# Altium PCB jeu_du_moulin_boura_PCB.PcbDoc (part 1 of 2)
Units mm, origin at the board's own origin, x right, y up, seen from the top; angles counter-clockwise.
Board outline 86 x 85 mm, 2 copper layers (Top Layer, Bottom Layer); 79 components, 60 nets, 368 pads, 129 vias.
Unrouted connection lines stored in the file: 22.
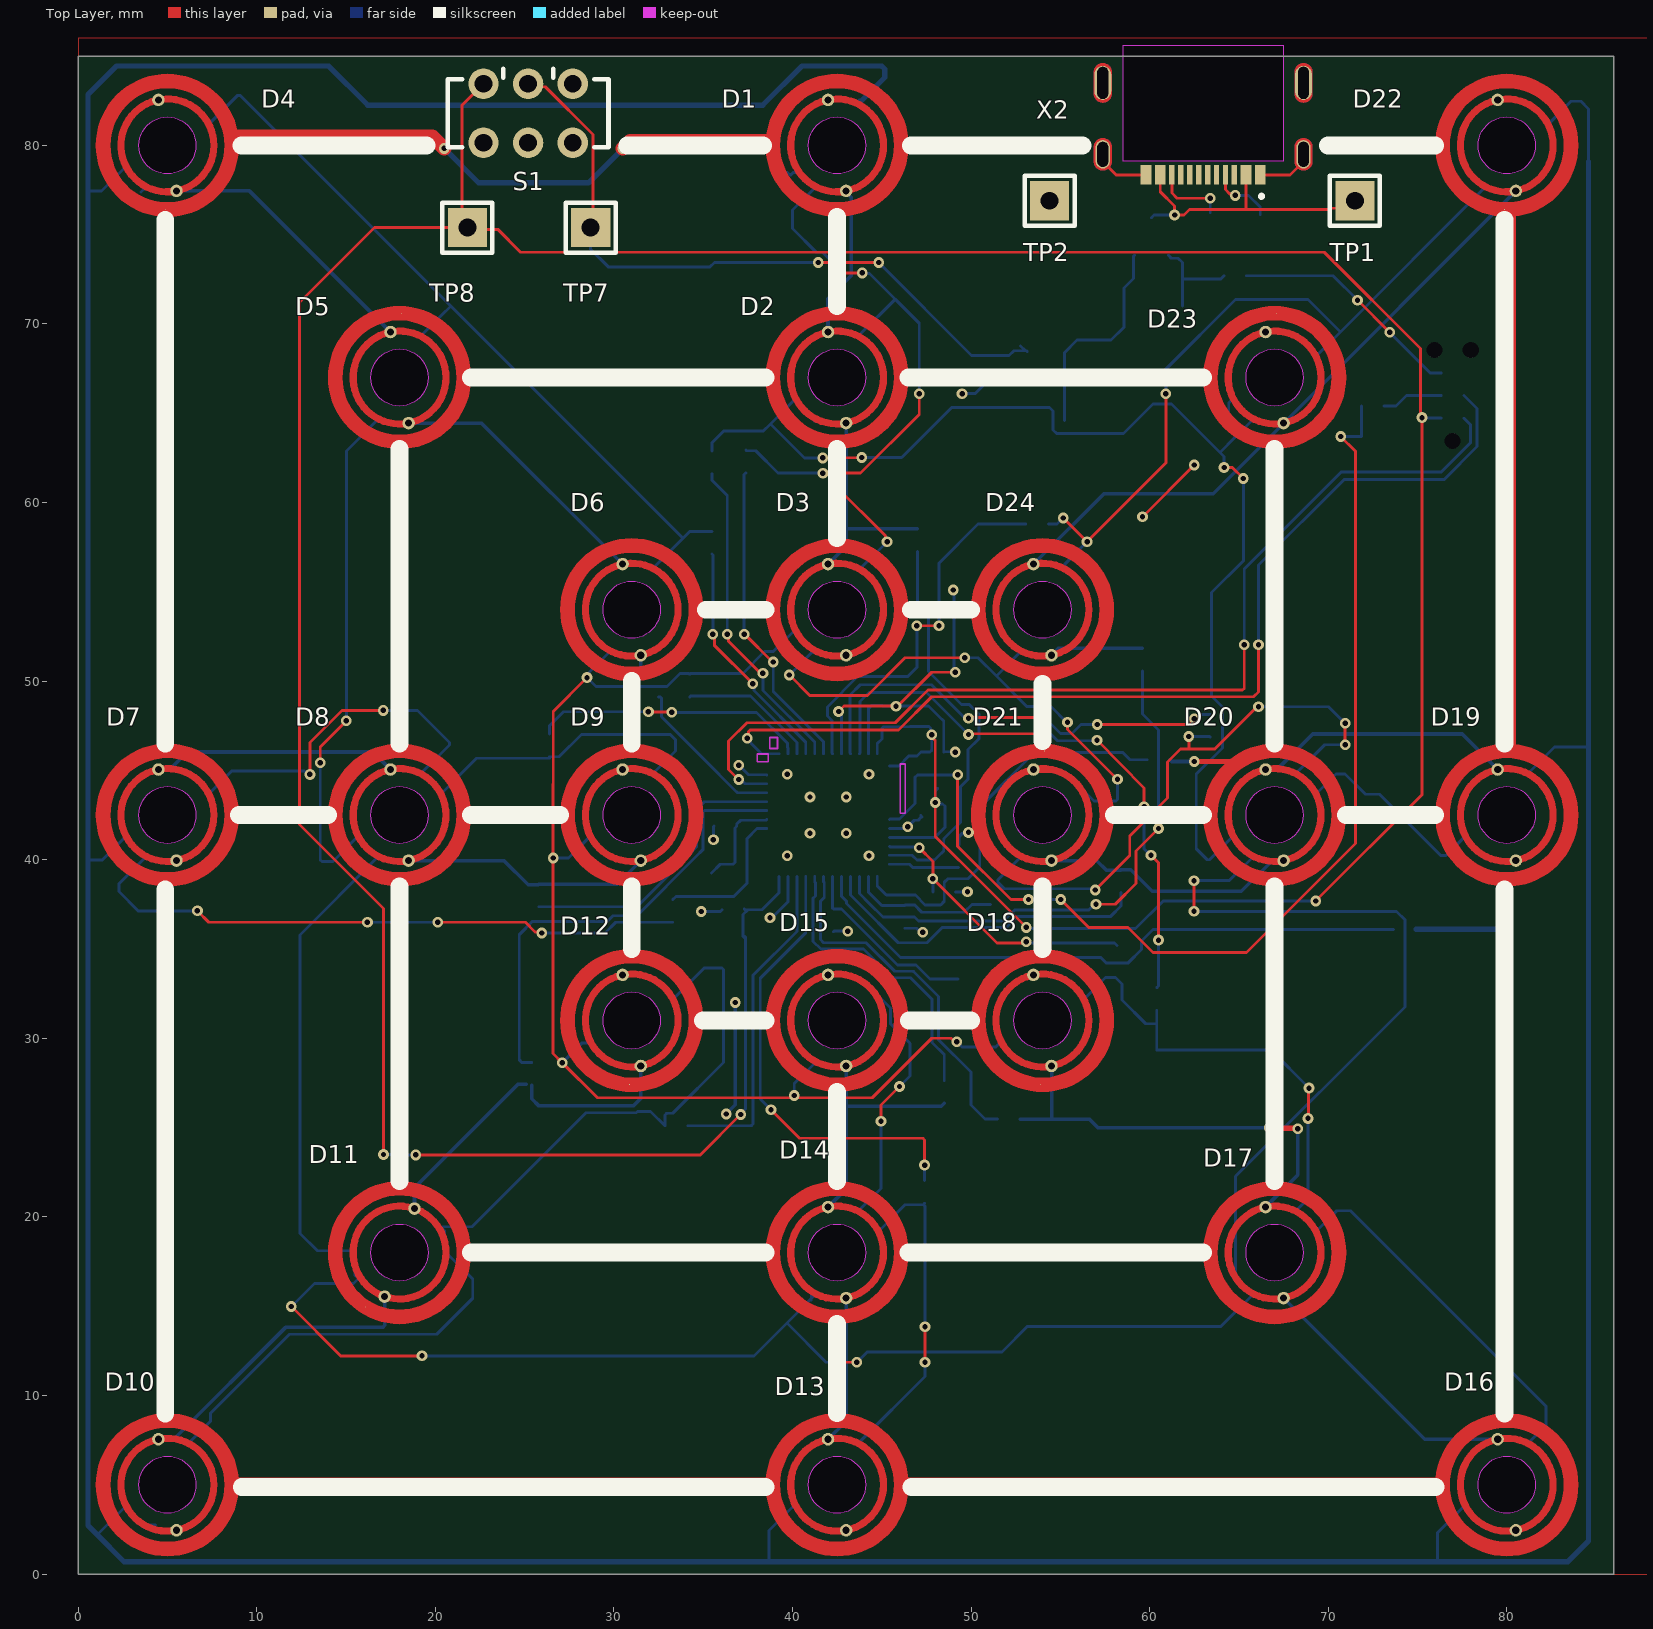
[diagram p0: Top Layer view]
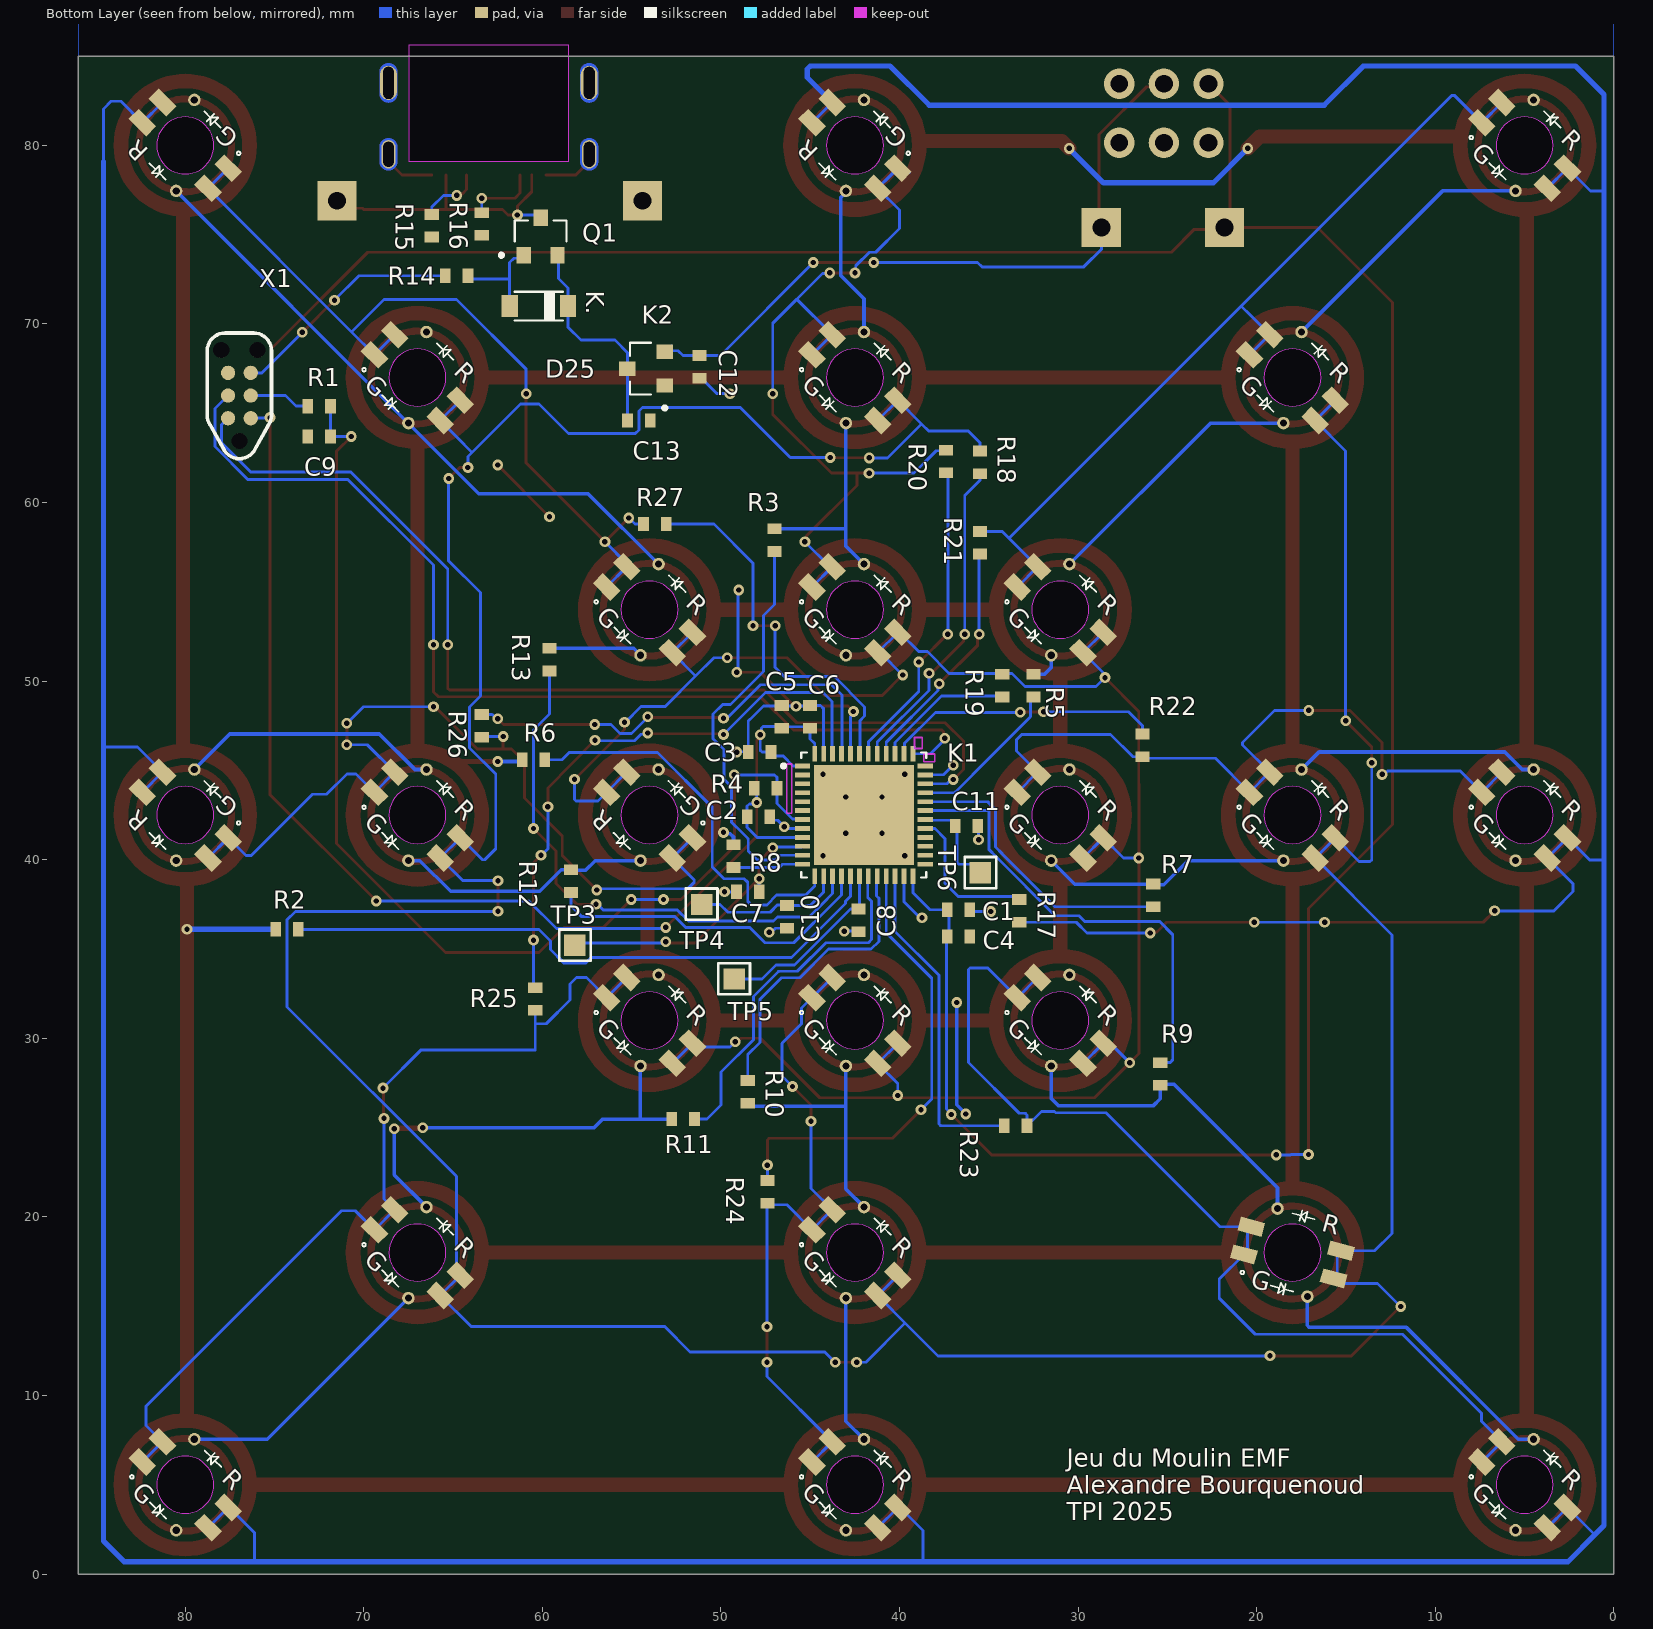
[diagram p1: Bottom Layer view, seen from below]
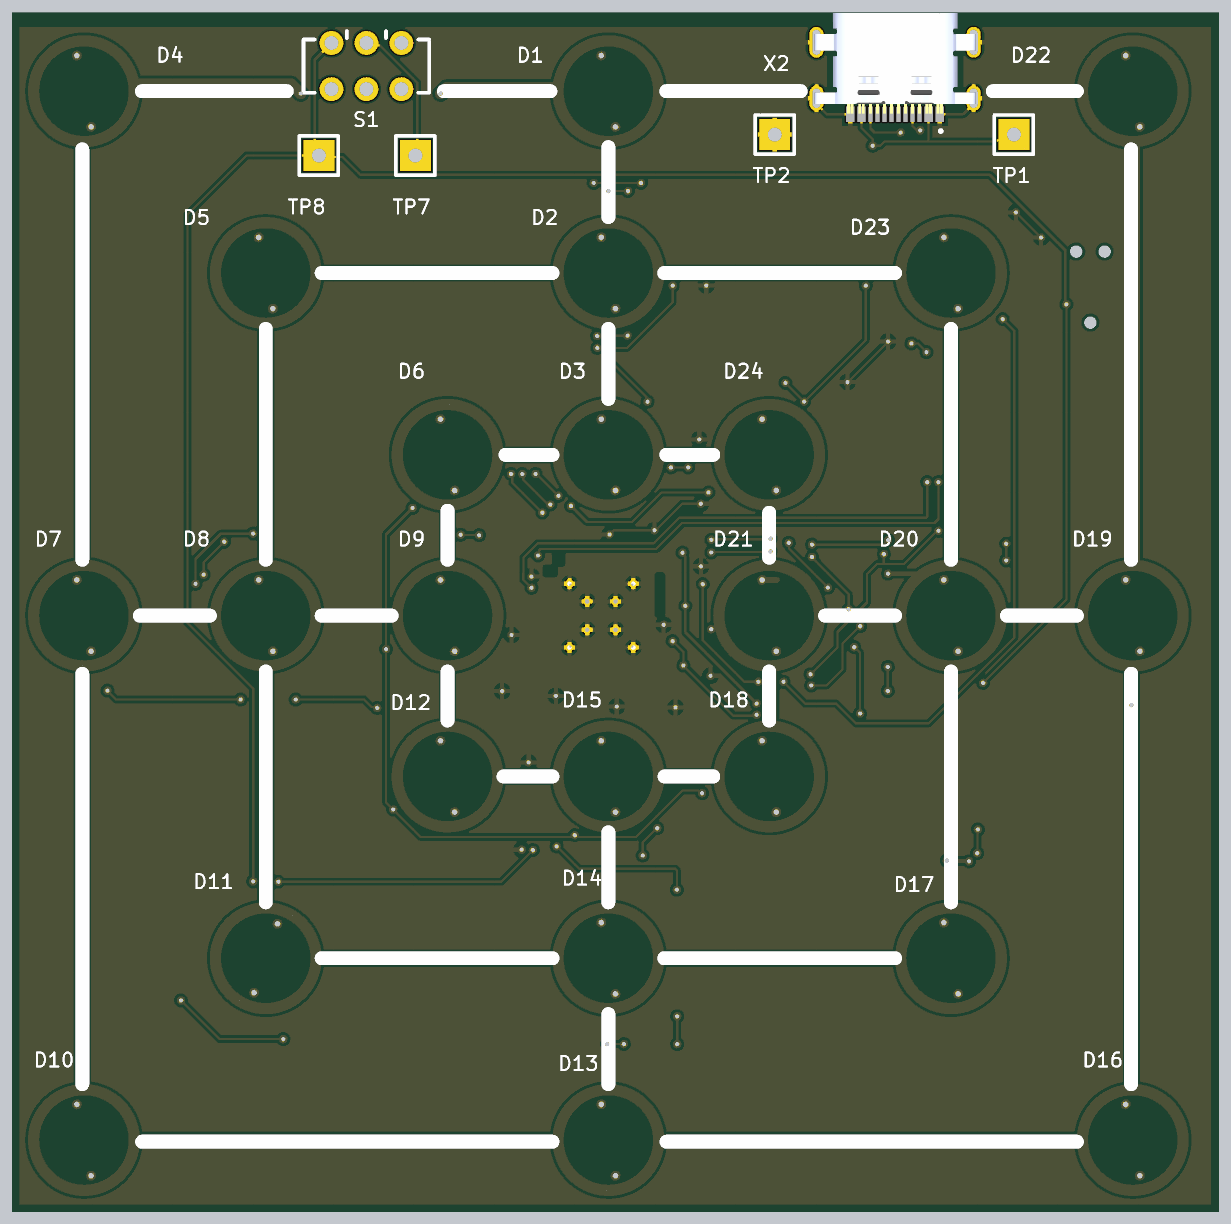
[diagram p3: 3D render of the assembled board from above, using the file's embedded part models]
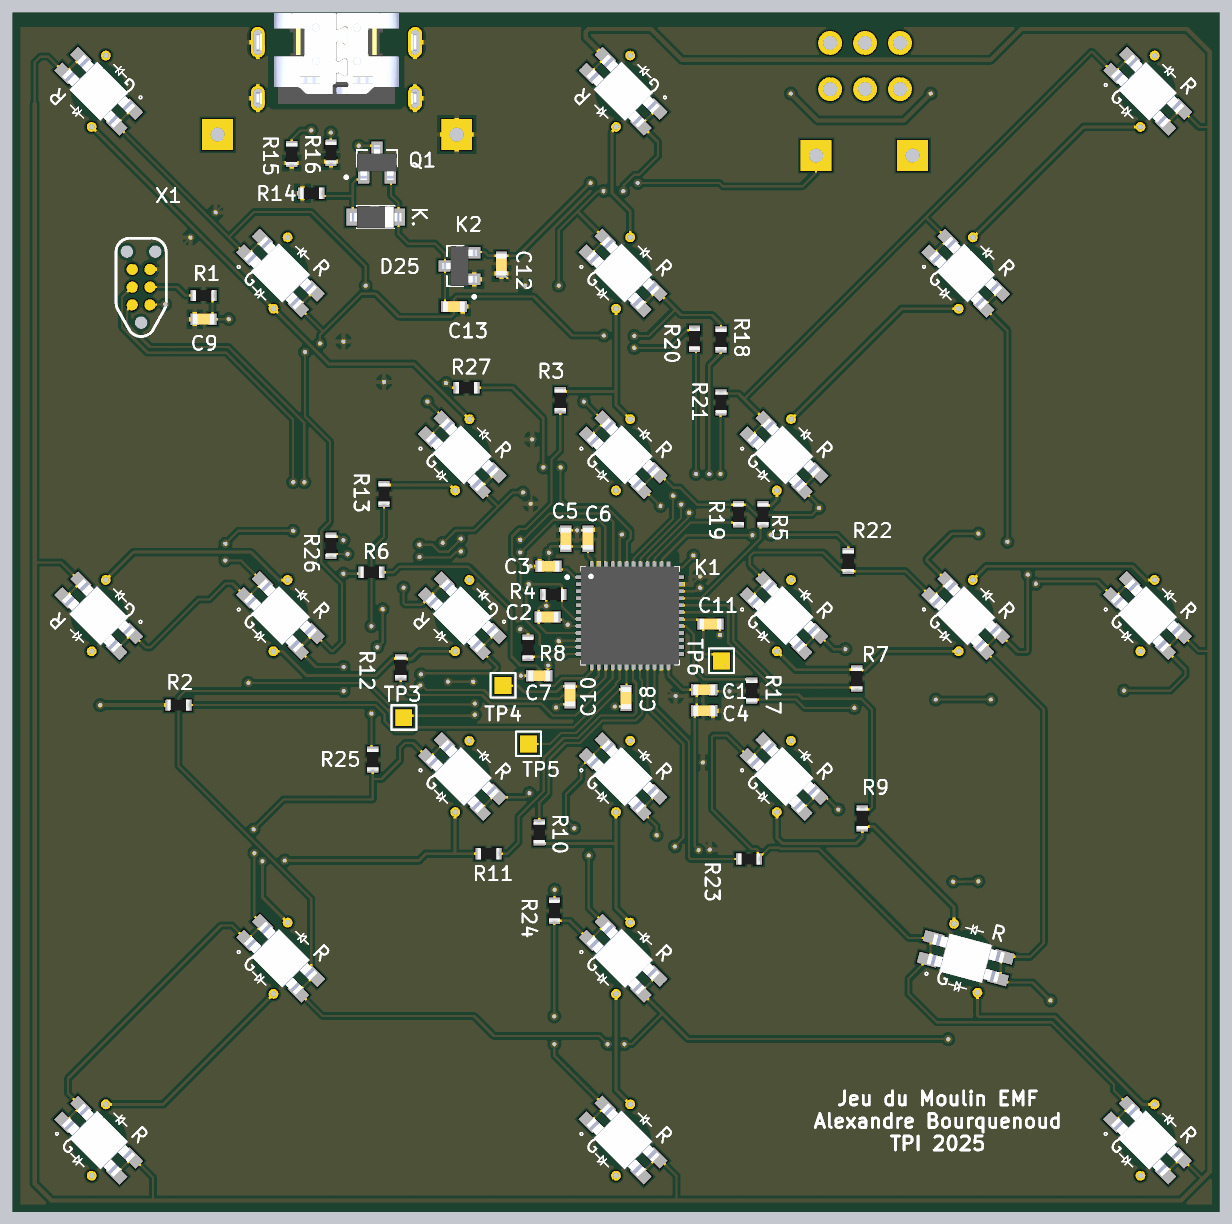
[diagram p4: 3D render of the assembled board from below, using the file's embedded part models]

## Layer stack, top to bottom
Top Solder: solder mask 0.0102, Solder Resist, Dk 3.5
Top Layer: signal copper 0.0356
Dielectric 1: dielectric 0.32, FR-4, Dk 4.8
Bottom Layer: signal copper 0.0356
Bottom Solder: solder mask 0.0102, Solder Resist, Dk 3.5

## Board outline
0,85 86,85 86,0 0,0

## Design rules (kind name [scope] priority, off if disabled: settings)
BoardOutlineClearance USBException [InComponent('X2')] p1: gap=0.19 ignorepadtopadclearanceinfootprint=FALSE
BoardOutlineClearance [All] p2: gap=0.4 ignorepadtopadclearanceinfootprint=FALSE
Clearance ClearanceMCUException [InComponent('K1')] p1: gap=0.1 ignorepadtopadclearanceinfootprint=FALSE
Clearance [All] p2: gap=0.2 ignorepadtopadclearanceinfootprint=FALSE
ComponentClearance [All] p1: gap=0.254 collisioncheckmode=3 verticalgap=0.254 showdistances=TRUE checkcomponentboundary=TRUE
HoleSize [All] p1: absolutevalues=TRUE maxlimit=5 minlimit=0.025 maxpercent=80.000 minpercent=20.000
MinimumSolderMaskSliver MinimumSolderMaskSliver_K1 [InComponent('K1')] p1: minsoldermaskwidth=0.015
MinimumSolderMaskSliver [All] p2: minsoldermaskwidth=0.254
NetAntennae TouchSens [OnLayer('Top Layer')] p1: netantennaetolerance=2000
NetAntennae [All] p2: netantennaetolerance=0
PasteMaskExpansion [HasFootprint('UFQFPN48')] p1: expansion=0 percent=-15.000000
PolygonConnect [All] p1: connectstyle=Relief reliefconductorwidth=0.3 reliefentries=4 polygonreliefangle="90 Angle" airgapwidth=0.3
RoutingVias [All] p1: holewidth=0.711 width=1.27 viastyle="Through Hole" minholewidth=0.711 minwidth=1.27 maxholewidth=0.711 maxwidth=1.27 useviatemplates=TRUE viatemplateguid#1={2E4D9DC0-E99D-456E-B73B-DE4053AAE91D} viatemplateguid#2={0BD63AC6-C6CC-444A-9AA9-DD401E3B135C} viatemplateguid#3={C98394D0-1A6B-4DEB-B82C-5A8B8B4D21F2} viatemplatename#1=v60h30m0mx0 viatemplatename#2=v65h35m0mx0 viatemplatename#3=v100h50m0mx0
SilkToSilkClearance [All] p1: silktosilkclearance=0.156
SilkToSolderMaskClearance SilkToSolderUSBException [HasFootprint('GCT_USB4520-03-0-A_REVA')] p1: minsilkscreentomaskgap=0.1 clearancetoexposedcopper=TRUE
SilkToSolderMaskClearance SilkToSolderuCException [HasFootprint('UFQFPN48')] p2: minsilkscreentomaskgap=0.1 clearancetoexposedcopper=TRUE
SilkToSolderMaskClearance [IsPad] p3: minsilkscreentomaskgap=0.126 clearancetoexposedcopper=TRUE
SolderMaskExpansion [All] p1: expansion=0.102 istentingtop=FALSE
Width "Schematic Width Constraint_3" [InNet('L5_TOUCH')] p1: maxlimit=0.8 minlimit=0.2 preferedwidth=0.8 toplayer_minwidth=0.3 bottomlayer_maxwidth=0.3 bottomlayer_prefwidth=0.25 minimp=50.000000 maximp=50.000000 favimp=50.000000
Width "Schematic Width Constraint_2" [InNet('L7_TOUCH')] p2: maxlimit=0.8 minlimit=0.2 preferedwidth=0.8 toplayer_minwidth=0.3 bottomlayer_maxwidth=0.3 bottomlayer_prefwidth=0.25 minimp=50.000000 maximp=50.000000 favimp=50.000000
Width "Schematic Width Constraint_1" [InNet('L6_TOUCH')] p3: maxlimit=0.8 minlimit=0.2 preferedwidth=0.8 toplayer_minwidth=0.3 bottomlayer_maxwidth=0.3 bottomlayer_prefwidth=0.25 minimp=50.000000 maximp=50.000000 favimp=50.000000
Width "Schematic Width Constraint" [InNet('L8_TOUCH')] p4: maxlimit=0.8 minlimit=0.2 preferedwidth=0.8 toplayer_minwidth=0.3 bottomlayer_maxwidth=0.3 bottomlayer_prefwidth=0.25 minimp=50.000000 maximp=50.000000 favimp=50.000000
Width "Schematic Width Constraint_12" [InNet('L1_TOUCH')] p5: maxlimit=0.8 minlimit=0.2 preferedwidth=0.8 toplayer_minwidth=0.3 bottomlayer_maxwidth=0.3 bottomlayer_prefwidth=0.25 minimp=50.000000 maximp=50.000000 favimp=50.000000
Width "Schematic Width Constraint_11" [InNet('L4_TOUCH')] p6: maxlimit=0.8 minlimit=0.2 preferedwidth=0.8 toplayer_minwidth=0.3 bottomlayer_maxwidth=0.3 bottomlayer_prefwidth=0.25 minimp=50.000000 maximp=50.000000 favimp=50.000000
Width "Schematic Width Constraint_10" [InNet('L3_TOUCH')] p7: maxlimit=0.8 minlimit=0.2 preferedwidth=0.8 toplayer_minwidth=0.3 bottomlayer_maxwidth=0.3 bottomlayer_prefwidth=0.25 minimp=50.000000 maximp=50.000000 favimp=50.000000
Width "Schematic Width Constraint_9" [InNet('C2_TOUCH')] p8: maxlimit=0.8 minlimit=0.2 preferedwidth=0.8 toplayer_minwidth=0.3 bottomlayer_maxwidth=0.3 bottomlayer_prefwidth=0.25 minimp=50.000000 maximp=50.000000 favimp=50.000000
Width "Schematic Width Constraint_8" [InNet('C1_TOUCH')] p9: maxlimit=0.8 minlimit=0.2 preferedwidth=0.8 toplayer_minwidth=0.3 bottomlayer_maxwidth=0.3 bottomlayer_prefwidth=0.25 minimp=50.000000 maximp=50.000000 favimp=50.000000
Width "Schematic Width Constraint_7" [InNet('C3_TOUCH')] p10: maxlimit=0.8 minlimit=0.2 preferedwidth=0.8 toplayer_minwidth=0.3 bottomlayer_maxwidth=0.3 bottomlayer_prefwidth=0.25 minimp=50.000000 maximp=50.000000 favimp=50.000000
Width Width_PAD [InComponent('D1')  Or InComponent('D2')  Or InComponent('D3')  Or InComponent('D4')  Or InComponent('D5')  Or InComponent('D6')  Or InComponent('D7')  Or InComponent('D8')  Or InComponent('D9')  Or InComponent('D10') Or InComponent('D11') Or InComponent('D12') Or InComponent('D13') Or InComponent('D14')] p11: maxlimit=1 minlimit=0.25 preferedwidth=0.254
Width "Schematic Width Constraint_6" [InNet('L2_TOUCH')] p12: maxlimit=0.8 minlimit=0.2 preferedwidth=0.8 toplayer_minwidth=0.3 bottomlayer_maxwidth=0.3 bottomlayer_prefwidth=0.25 minimp=50.000000 maximp=50.000000 favimp=50.000000
Width [All] p13: maxlimit=0.3 minlimit=0.16 preferedwidth=0.25
23 further rules are at their usual default settings.

## Classes and differential pairs
component class jeu_du_moulin_boura_LedMatrix_SCH: R17 R18 R19 R20 R21 R22 R23 R24 R25 R26 R27
component class jeu_du_moulin_boura_TouchPAD_SCH: D1 D2 D3 D4 D5 D6 D7 D8 D9 D10 D11 D12 D13 D14 D15 D16 D17 D18 D19 D20 D21 D22 D23 D24
component class jeu_du_moulin_boura_uP_SCH: C1 C2 C3 C4 C5 C6 C7 C8 C9 C10 C11 C12 C13 D25 K1 K2 Q1 R1 R2 R3 R4 R5 R6 R7 R8 R9 R10 R11 R12 R13 R14 R15 R16 S1 TP1 TP2 TP3 TP4 TP5 TP6 TP7 TP8 X1 X2

## Components (designator, comment, footprint, x,y, rotation, side; value= is the part's Value field where it differs from the comment)
C1 "10uF" CSMD0603 36.7,37.2 r180 bottom
C2 "100nF" CSMD0603 47.9,42.4 r180 bottom
C3 "100nF" CSMD0603 47.835,46.033 r0 bottom
C4 "1uF" CSMD0603 36.7,35.7 r180 bottom
C5 "100nF" CSMD0603 46.6,48 r90 bottom
C6 "100nF" CSMD0603 45.019,48 r90 bottom
C7 "47nF" CSMD0603 48.5,38.2 r0 bottom
C8 "47nF" CSMD0603 42.3,36.6 r270 bottom
C9 "100nF" CSMD0603 72.5,63.7 r0 bottom
C10 "47nF" CSMD0603 46.3,36.8 r270 bottom
C11 "47nF" CSMD0603 36.25,41.891 r180 bottom
C12 "1uF" CSMD0603 51.2,67.6 r90 bottom
C13 "1uF" CSMD0603 54.6,64.6 r0 bottom
D1 "AAA3528SURKCGKC09" "TOUCHPAD-8MM+LED 4-SMD CIR" 42.5,80 r180 top
D2 "AAA3528SURKCGKC09" "TOUCHPAD-8MM+LED 4-SMD CIR" 42.5,67 r0 top
D3 "AAA3528SURKCGKC09" "TOUCHPAD-8MM+LED 4-SMD CIR" 42.5,54 r0 top
D4 "AAA3528SURKCGKC09" "TOUCHPAD-8MM+LED 4-SMD CIR" 5,80 r0 top
D5 "AAA3528SURKCGKC09" "TOUCHPAD-8MM+LED 4-SMD CIR" 18,67 r0 top
D6 "AAA3528SURKCGKC09" "TOUCHPAD-8MM+LED 4-SMD CIR" 31,54 r0 top
D7 "AAA3528SURKCGKC09" "TOUCHPAD-8MM+LED 4-SMD CIR" 5,42.5 r0 top
D8 "AAA3528SURKCGKC09" "TOUCHPAD-8MM+LED 4-SMD CIR" 18,42.5 r0 top
D9 "AAA3528SURKCGKC09" "TOUCHPAD-8MM+LED 4-SMD CIR" 31,42.5 r0 top
D10 "AAA3528SURKCGKC09" "TOUCHPAD-8MM+LED 4-SMD CIR" 5,5 r0 top
D11 "AAA3528SURKCGKC09" "TOUCHPAD-8MM+LED 4-SMD CIR" 18,18 r330 top
D12 "AAA3528SURKCGKC09" "TOUCHPAD-8MM+LED 4-SMD CIR" 31,31 r0 top
D13 "AAA3528SURKCGKC09" "TOUCHPAD-8MM+LED 4-SMD CIR" 42.5,5 r0 top
D14 "AAA3528SURKCGKC09" "TOUCHPAD-8MM+LED 4-SMD CIR" 42.5,18 r0 top
D15 "AAA3528SURKCGKC09" "TOUCHPAD-8MM+LED 4-SMD CIR" 42.5,31 r0 top
D16 "AAA3528SURKCGKC09" "TOUCHPAD-8MM+LED 4-SMD CIR" 80,5 r0 top
D17 "AAA3528SURKCGKC09" "TOUCHPAD-8MM+LED 4-SMD CIR" 67,18 r0 top
D18 "AAA3528SURKCGKC09" "TOUCHPAD-8MM+LED 4-SMD CIR" 54,31 r0 top
D19 "AAA3528SURKCGKC09" "TOUCHPAD-8MM+LED 4-SMD CIR" 80,42.5 r180 top
D20 "AAA3528SURKCGKC09" "TOUCHPAD-8MM+LED 4-SMD CIR" 67,42.5 r0 top
D21 "AAA3528SURKCGKC09" "TOUCHPAD-8MM+LED 4-SMD CIR" 54,42.5 r180 top
D22 "AAA3528SURKCGKC09" "TOUCHPAD-8MM+LED 4-SMD CIR" 80,80 r180 top
D23 "AAA3528SURKCGKC09" "TOUCHPAD-8MM+LED 4-SMD CIR" 67,67 r0 top
D24 "AAA3528SURKCGKC09" "TOUCHPAD-8MM+LED 4-SMD CIR" 54,54 r0 top
D25 "Zener 2.4V" SOD-123 60.2,71 r0 bottom
K1 "STM32L072CZU6" UFQFPN48 42,42.5 r180 bottom
K2 "Voltage Regulator 3.3V" SOT95P240X88-3N 54.2,67.5 r90 bottom
Q1 "MOSFET Channel P" SOT95P240X88-3N 60.1,74.9 r180 bottom
R1 "NMT" RSMD0603 72.5,65.4 r0 bottom
R2 "10K" RSMD0603 74.3,36.1 r0 bottom
R3 "10K" RSMD0603 47,57.9 r90 bottom
R4 "39K" RSMD0603 47.5,44 r180 bottom
R5 "10K" RSMD0603 32.5,49.75 r90 bottom
R6 "10K" RSMD0603 60.5,45.6 r0 bottom
R7 "10K" RSMD0603 25.8,38 r90 bottom
R8 "10K" RSMD0603 49.3,40.2 r90 bottom
R9 "10K" RSMD0603 25.4,28 r270 bottom
R10 "10K" RSMD0603 48.5,27 r270 bottom
R11 "10K" RSMD0603 52.121,25.476 r0 bottom
R12 "10K" RSMD0603 58.4,38.8 r90 bottom
R13 "10K" RSMD0603 59.6,51.2 r90 bottom
R14 "220E" RSMD0603 64.8,72.7 r0 bottom
R15 "5.1k" RSMD0603 66.2,75.5 r90 bottom
R16 "5.1k" RSMD0603 63.4,75.6 r90 bottom
R17 "150E" RSMD0603 33.299,37.135 r270 bottom
R18 "150E" RSMD0603 35.5,62.25 r90 bottom
R19 "150E" RSMD0603 34.25,49.75 r90 bottom
R20 "150E" RSMD0603 37.4,62.3 r270 bottom
R21 "150E" RSMD0603 35.5,57.75 r270 bottom
R22 "150E" RSMD0603 26.4,46.4 r90 bottom
R23 "150E" RSMD0603 33.5,25.1 r0 bottom
R24 "150E" RSMD0603 47.4,21.4 r90 bottom
R25 "150E" RSMD0603 60.4,32.2 r90 bottom
R26 "150E" RSMD0603 63.4,47.5 r90 bottom
R27 "150E" RSMD0603 53.7,58.8 r180 bottom
S1 "SW_SPDT" "SWITCH SLIDE DPDT" 25.2,81.8 r180 top
TP1 "TP rouge" TP10_22 71.5,76.9 r0 top
TP2 "TP noir" TP10_22 54.4,76.9 r0 top
TP3 "Test Point" TP 58.191,35.204 r180 bottom
TP4 "Test Point" TP 51.1,37.5 r180 bottom
TP5 "Test Point" TP 49.276,33.325 r180 bottom
TP6 "Test Point" TP 35.484,39.268 r180 bottom
TP7 "TP rouge" TP10_22 28.7,75.4 r0 top
TP8 "TP noir" TP10_22 21.8,75.4 r0 top
X1 "CONNECTOR TC2030-NL" "T-CONNECT 2030" 76.97,65.993 r90 bottom
X2 "USB4520-03-0-A_REVA" GCT_USB4520-03-0-A_REVA 63,83.5 r180 top

## Footprints (in the part's own frame and the unit in brackets; to place one, negate y for a bottom-side part, rotate by r counter-clockwise, add the part's x,y. Pads: shape width x height; smd on the part's side, far side on the other; paste and mask are expansions set on the pad)
CSMD0603 [mm] "P1 - 0603"
  rect 0.6x0.8 smd: 1(-0.635,0) 2(0.635,0)
  body extent -0.8,-0.4 0.8,0.4, height 0.85
GCT_USB4520-03-0-A_REVA [mm] "USB-C"
  rect 0.6x1.1 smd: A1_B12(-3.2,5.15) A4_B9(-2.4,5.15) B1_A12(3.2,5.15) B4_A9(2.4,5.15)
  rect 0.3x1.1 smd: A5(-1.25,5.15) A6(-0.25,5.15) A7(0.25,5.15) A8(1.25,5.15) B5(1.75,5.15) B6(0.75,5.15) B7(-0.75,5.15) B8(-1.75,5.15)
  oval 0.95x1.9 hole 0.6 slot 1.8 at 90 deg mask+0: S1(-5.62,0) S4(5.62,0)
  oval 0.8x1.6 hole 0.6 slot 1.4 at 90 deg mask+0: S2(5.62,4) S3(-5.62,4)
  Top Layer region: -5.594,4.899 -5.568,4.897 -5.542,4.894 -5.516,4.889 -5.491,4.883 -5.465,4.876 -5.441,4.867 -5.417,4.857 -5.393,4.846 -5.37,4.833 -5.348,4.819 -5.326,4.805 -5.305,4.789 -5.285,4.772 -5.266,4.754 -5.248,4.735 -5.231,4.715 -5.215,4.694 -5.201,4.672 -5.187,4.65 -5.174,4.627 -5.163,4.603 -5.153,4.579 -5.144,4.555 -5.137,4.529 -5.131,4.504 -5.126,4.478 -5.123,4.452 -5.121,4.426 -5.12,4.4 -5.12,3.6 -5.121,3.574 -5.123,3.548 -5.126,3.522 -5.131,3.496 -5.137,3.471 -5.144,3.445 -5.153,3.421 -5.163,3.397 -5.174,3.373 -5.187,3.35 -5.201,3.328 -5.215,3.306 -5.231,3.285 -5.248,3.265 -5.266,3.246 -5.285,3.228 -5.305,3.211 -5.326,3.195 -5.348,3.181 -5.37,3.167 -5.393,3.154 -5.417,3.143 -5.441,3.133 -5.465,3.124 -5.491,3.117 -5.516,3.111 -5.542,3.106 -5.568,3.103 -5.594,3.101 -5.62,3.1 -5.646,3.101 -5.672,3.103 -5.698,3.106 -5.724,3.111 -5.749,3.117 -5.775,3.124 -5.799,3.133 -5.823,3.143 -5.847,3.154 -5.87,3.167 -5.892,3.181 -5.914,3.195 -5.935,3.211 -5.955,3.228 -5.974,3.246 -5.992,3.265 -6.009,3.285 -6.025,3.306 -6.039,3.328 -6.053,3.35 -6.066,3.373 -6.077,3.397 -6.087,3.421 -6.096,3.445 -6.103,3.471 -6.109,3.496 -6.114,3.522 -6.117,3.548 -6.119,3.574 -6.12,3.6 -6.12,4.4 -6.119,4.426 -6.117,4.452 -6.114,4.478 -6.109,4.504 -6.103,4.529 -6.096,4.555 -6.087,4.579 -6.077,4.603 -6.066,4.627 -6.053,4.65 -6.039,4.672 -6.025,4.694 -6.009,4.715 -5.992,4.735 -5.974,4.754 -5.955,4.772 -5.935,4.789 -5.914,4.805 -5.892,4.819 -5.87,4.833 -5.847,4.846 -5.823,4.857 -5.799,4.867 -5.775,4.876 -5.749,4.883 -5.724,4.889 -5.698,4.894 -5.672,4.897 -5.646,4.899 -5.62,4.9
  Top Layer region: 5.646,4.899 5.672,4.897 5.698,4.894 5.724,4.889 5.749,4.883 5.775,4.876 5.799,4.867 5.823,4.857 5.847,4.846 5.87,4.833 5.892,4.819 5.914,4.805 5.935,4.789 5.955,4.772 5.974,4.754 5.992,4.735 6.009,4.715 6.025,4.694 6.039,4.672 6.053,4.65 6.066,4.627 6.077,4.603 6.087,4.579 6.096,4.555 6.103,4.529 6.109,4.504 6.114,4.478 6.117,4.452 6.119,4.426 6.12,4.4 6.12,3.6 6.119,3.574 6.117,3.548 6.114,3.522 6.109,3.496 6.103,3.471 6.096,3.445 6.087,3.421 6.077,3.397 6.066,3.373 6.053,3.35 6.039,3.328 6.025,3.306 6.009,3.285 5.992,3.265 5.974,3.246 5.955,3.228 5.935,3.211 5.914,3.195 5.892,3.181 5.87,3.167 5.847,3.154 5.823,3.143 5.799,3.133 5.775,3.124 5.749,3.117 5.724,3.111 5.698,3.106 5.672,3.103 5.646,3.101 5.62,3.1 5.594,3.101 5.568,3.103 5.542,3.106 5.516,3.111 5.491,3.117 5.465,3.124 5.441,3.133 5.417,3.143 5.393,3.154 5.37,3.167 5.348,3.181 5.326,3.195 5.305,3.211 5.285,3.228 5.266,3.246 5.248,3.265 5.231,3.285 5.215,3.306 5.201,3.328 5.187,3.35 5.174,3.373 5.163,3.397 5.153,3.421 5.144,3.445 5.137,3.471 5.131,3.496 5.126,3.522 5.123,3.548 5.121,3.574 5.12,3.6 5.12,4.4 5.121,4.426 5.123,4.452 5.126,4.478 5.131,4.504 5.137,4.529 5.144,4.555 5.153,4.579 5.163,4.603 5.174,4.627 5.187,4.65 5.201,4.672 5.215,4.694 5.231,4.715 5.248,4.735 5.266,4.754 5.285,4.772 5.305,4.789 5.326,4.805 5.348,4.819 5.37,4.833 5.393,4.846 5.417,4.857 5.441,4.867 5.465,4.876 5.491,4.883 5.516,4.889 5.542,4.894 5.568,4.897 5.594,4.899 5.62,4.9
  Top Layer region: -5.594,1.099 -5.568,1.097 -5.542,1.094 -5.516,1.089 -5.491,1.083 -5.465,1.076 -5.441,1.067 -5.417,1.057 -5.393,1.046 -5.37,1.033 -5.348,1.019 -5.326,1.005 -5.305,0.989 -5.285,0.972 -5.266,0.954 -5.248,0.935 -5.231,0.915 -5.215,0.894 -5.201,0.872 -5.187,0.85 -5.174,0.827 -5.163,0.803 -5.153,0.779 -5.144,0.755 -5.137,0.729 -5.131,0.704 -5.126,0.678 -5.123,0.652 -5.121,0.626 -5.12,0.6 -5.12,-0.6 -5.121,-0.626 -5.123,-0.652 -5.126,-0.678 -5.131,-0.704 -5.137,-0.729 -5.144,-0.755 -5.153,-0.779 -5.163,-0.803 -5.174,-0.827 -5.187,-0.85 -5.201,-0.872 -5.215,-0.894 -5.231,-0.915 -5.248,-0.935 -5.266,-0.954 -5.285,-0.972 -5.305,-0.989 -5.326,-1.005 -5.348,-1.019 -5.37,-1.033 -5.393,-1.046 -5.417,-1.057 -5.441,-1.067 -5.465,-1.076 -5.491,-1.083 -5.516,-1.089 -5.542,-1.094 -5.568,-1.097 -5.594,-1.099 -5.62,-1.1 -5.646,-1.099 -5.672,-1.097 -5.698,-1.094 -5.724,-1.089 -5.749,-1.083 -5.775,-1.076 -5.799,-1.067 -5.823,-1.057 -5.847,-1.046 -5.87,-1.033 -5.892,-1.019 -5.914,-1.005 -5.935,-0.989 -5.955,-0.972 -5.974,-0.954 -5.992,-0.935 -6.009,-0.915 -6.025,-0.894 -6.039,-0.872 -6.053,-0.85 -6.066,-0.827 -6.077,-0.803 -6.087,-0.779 -6.096,-0.755 -6.103,-0.729 -6.109,-0.704 -6.114,-0.678 -6.117,-0.652 -6.119,-0.626 -6.12,-0.6 -6.12,0.6 -6.119,0.626 -6.117,0.652 -6.114,0.678 -6.109,0.704 -6.103,0.729 -6.096,0.755 -6.087,0.779 -6.077,0.803 -6.066,0.827 -6.053,0.85 -6.039,0.872 -6.025,0.894 -6.009,0.915 -5.992,0.935 -5.974,0.954 -5.955,0.972 -5.935,0.989 -5.914,1.005 -5.892,1.019 -5.87,1.033 -5.847,1.046 -5.823,1.057 -5.799,1.067 -5.775,1.076 -5.749,1.083 -5.724,1.089 -5.698,1.094 -5.672,1.097 -5.646,1.099 -5.62,1.1
  Top Layer region: 5.646,1.099 5.672,1.097 5.698,1.094 5.724,1.089 5.749,1.083 5.775,1.076 5.799,1.067 5.823,1.057 5.847,1.046 5.87,1.033 5.892,1.019 5.914,1.005 5.935,0.989 5.955,0.972 5.974,0.954 5.992,0.935 6.009,0.915 6.025,0.894 6.039,0.872 6.053,0.85 6.066,0.827 6.077,0.803 6.087,0.779 6.096,0.755 6.103,0.729 6.109,0.704 6.114,0.678 6.117,0.652 6.119,0.626 6.12,0.6 6.12,-0.6 6.119,-0.626 6.117,-0.652 6.114,-0.678 6.109,-0.704 6.103,-0.729 6.096,-0.755 6.087,-0.779 6.077,-0.803 6.066,-0.827 6.053,-0.85 6.039,-0.872 6.025,-0.894 6.009,-0.915 5.992,-0.935 5.974,-0.954 5.955,-0.972 5.935,-0.989 5.914,-1.005 5.892,-1.019 5.87,-1.033 5.847,-1.046 5.823,-1.057 5.799,-1.067 5.775,-1.076 5.749,-1.083 5.724,-1.089 5.698,-1.094 5.672,-1.097 5.646,-1.099 5.62,-1.1 5.594,-1.099 5.568,-1.097 5.542,-1.094 5.516,-1.089 5.491,-1.083 5.465,-1.076 5.441,-1.067 5.417,-1.057 5.393,-1.046 5.37,-1.033 5.348,-1.019 5.326,-1.005 5.305,-0.989 5.285,-0.972 5.266,-0.954 5.248,-0.935 5.231,-0.915 5.215,-0.894 5.201,-0.872 5.187,-0.85 5.174,-0.827 5.163,-0.803 5.153,-0.779 5.144,-0.755 5.137,-0.729 5.131,-0.704 5.126,-0.678 5.123,-0.652 5.121,-0.626 5.12,-0.6 5.12,0.6 5.121,0.626 5.123,0.652 5.126,0.678 5.131,0.704 5.137,0.729 5.144,0.755 5.153,0.779 5.163,0.803 5.174,0.827 5.187,0.85 5.201,0.872 5.215,0.894 5.231,0.915 5.248,0.935 5.266,0.954 5.285,0.972 5.305,0.989 5.326,1.005 5.348,1.019 5.37,1.033 5.393,1.046 5.417,1.057 5.441,1.067 5.465,1.076 5.491,1.083 5.516,1.089 5.542,1.094 5.568,1.097 5.594,1.099 5.62,1.1
  Bottom Layer region: -5.594,4.899 -5.568,4.897 -5.542,4.894 -5.516,4.889 -5.491,4.883 -5.465,4.876 -5.441,4.867 -5.417,4.857 -5.393,4.846 -5.37,4.833 -5.348,4.819 -5.326,4.805 -5.305,4.789 -5.285,4.772 -5.266,4.754 -5.248,4.735 -5.231,4.715 -5.215,4.694 -5.201,4.672 -5.187,4.65 -5.174,4.627 -5.163,4.603 -5.153,4.579 -5.144,4.555 -5.137,4.529 -5.131,4.504 -5.126,4.478 -5.123,4.452 -5.121,4.426 -5.12,4.4 -5.12,3.6 -5.121,3.574 -5.123,3.548 -5.126,3.522 -5.131,3.496 -5.137,3.471 -5.144,3.445 -5.153,3.421 -5.163,3.397 -5.174,3.373 -5.187,3.35 -5.201,3.328 -5.215,3.306 -5.231,3.285 -5.248,3.265 -5.266,3.246 -5.285,3.228 -5.305,3.211 -5.326,3.195 -5.348,3.181 -5.37,3.167 -5.393,3.154 -5.417,3.143 -5.441,3.133 -5.465,3.124 -5.491,3.117 -5.516,3.111 -5.542,3.106 -5.568,3.103 -5.594,3.101 -5.62,3.1 -5.646,3.101 -5.672,3.103 -5.698,3.106 -5.724,3.111 -5.749,3.117 -5.775,3.124 -5.799,3.133 -5.823,3.143 -5.847,3.154 -5.87,3.167 -5.892,3.181 -5.914,3.195 -5.935,3.211 -5.955,3.228 -5.974,3.246 -5.992,3.265 -6.009,3.285 -6.025,3.306 -6.039,3.328 -6.053,3.35 -6.066,3.373 -6.077,3.397 -6.087,3.421 -6.096,3.445 -6.103,3.471 -6.109,3.496 -6.114,3.522 -6.117,3.548 -6.119,3.574 -6.12,3.6 -6.12,4.4 -6.119,4.426 -6.117,4.452 -6.114,4.478 -6.109,4.504 -6.103,4.529 -6.096,4.555 -6.087,4.579 -6.077,4.603 -6.066,4.627 -6.053,4.65 -6.039,4.672 -6.025,4.694 -6.009,4.715 -5.992,4.735 -5.974,4.754 -5.955,4.772 -5.935,4.789 -5.914,4.805 -5.892,4.819 -5.87,4.833 -5.847,4.846 -5.823,4.857 -5.799,4.867 -5.775,4.876 -5.749,4.883 -5.724,4.889 -5.698,4.894 -5.672,4.897 -5.646,4.899 -5.62,4.9
  Bottom Layer region: 5.646,4.899 5.672,4.897 5.698,4.894 5.724,4.889 5.749,4.883 5.775,4.876 5.799,4.867 5.823,4.857 5.847,4.846 5.87,4.833 5.892,4.819 5.914,4.805 5.935,4.789 5.955,4.772 5.974,4.754 5.992,4.735 6.009,4.715 6.025,4.694 6.039,4.672 6.053,4.65 6.066,4.627 6.077,4.603 6.087,4.579 6.096,4.555 6.103,4.529 6.109,4.504 6.114,4.478 6.117,4.452 6.119,4.426 6.12,4.4 6.12,3.6 6.119,3.574 6.117,3.548 6.114,3.522 6.109,3.496 6.103,3.471 6.096,3.445 6.087,3.421 6.077,3.397 6.066,3.373 6.053,3.35 6.039,3.328 6.025,3.306 6.009,3.285 5.992,3.265 5.974,3.246 5.955,3.228 5.935,3.211 5.914,3.195 5.892,3.181 5.87,3.167 5.847,3.154 5.823,3.143 5.799,3.133 5.775,3.124 5.749,3.117 5.724,3.111 5.698,3.106 5.672,3.103 5.646,3.101 5.62,3.1 5.594,3.101 5.568,3.103 5.542,3.106 5.516,3.111 5.491,3.117 5.465,3.124 5.441,3.133 5.417,3.143 5.393,3.154 5.37,3.167 5.348,3.181 5.326,3.195 5.305,3.211 5.285,3.228 5.266,3.246 5.248,3.265 5.231,3.285 5.215,3.306 5.201,3.328 5.187,3.35 5.174,3.373 5.163,3.397 5.153,3.421 5.144,3.445 5.137,3.471 5.131,3.496 5.126,3.522 5.123,3.548 5.121,3.574 5.12,3.6 5.12,4.4 5.121,4.426 5.123,4.452 5.126,4.478 5.131,4.504 5.137,4.529 5.144,4.555 5.153,4.579 5.163,4.603 5.174,4.627 5.187,4.65 5.201,4.672 5.215,4.694 5.231,4.715 5.248,4.735 5.266,4.754 5.285,4.772 5.305,4.789 5.326,4.805 5.348,4.819 5.37,4.833 5.393,4.846 5.417,4.857 5.441,4.867 5.465,4.876 5.491,4.883 5.516,4.889 5.542,4.894 5.568,4.897 5.594,4.899 5.62,4.9
  Bottom Layer region: 5.646,1.099 5.672,1.097 5.698,1.094 5.724,1.089 5.749,1.083 5.775,1.076 5.799,1.067 5.823,1.057 5.847,1.046 5.87,1.033 5.892,1.019 5.914,1.005 5.935,0.989 5.955,0.972 5.974,0.954 5.992,0.935 6.009,0.915 6.025,0.894 6.039,0.872 6.053,0.85 6.066,0.827 6.077,0.803 6.087,0.779 6.096,0.755 6.103,0.729 6.109,0.704 6.114,0.678 6.117,0.652 6.119,0.626 6.12,0.6 6.12,-0.6 6.119,-0.626 6.117,-0.652 6.114,-0.678 6.109,-0.704 6.103,-0.729 6.096,-0.755 6.087,-0.779 6.077,-0.803 6.066,-0.827 6.053,-0.85 6.039,-0.872 6.025,-0.894 6.009,-0.915 5.992,-0.935 5.974,-0.954 5.955,-0.972 5.935,-0.989 5.914,-1.005 5.892,-1.019 5.87,-1.033 5.847,-1.046 5.823,-1.057 5.799,-1.067 5.775,-1.076 5.749,-1.083 5.724,-1.089 5.698,-1.094 5.672,-1.097 5.646,-1.099 5.62,-1.1 5.594,-1.099 5.568,-1.097 5.542,-1.094 5.516,-1.089 5.491,-1.083 5.465,-1.076 5.441,-1.067 5.417,-1.057 5.393,-1.046 5.37,-1.033 5.348,-1.019 5.326,-1.005 5.305,-0.989 5.285,-0.972 5.266,-0.954 5.248,-0.935 5.231,-0.915 5.215,-0.894 5.201,-0.872 5.187,-0.85 5.174,-0.827 5.163,-0.803 5.153,-0.779 5.144,-0.755 5.137,-0.729 5.131,-0.704 5.126,-0.678 5.123,-0.652 5.121,-0.626 5.12,-0.6 5.12,0.6 5.121,0.626 5.123,0.652 5.126,0.678 5.131,0.704 5.137,0.729 5.144,0.755 5.153,0.779 5.163,0.803 5.174,0.827 5.187,0.85 5.201,0.872 5.215,0.894 5.231,0.915 5.248,0.935 5.266,0.954 5.285,0.972 5.305,0.989 5.326,1.005 5.348,1.019 5.37,1.033 5.393,1.046 5.417,1.057 5.441,1.067 5.465,1.076 5.491,1.083 5.516,1.089 5.542,1.094 5.568,1.097 5.594,1.099 5.62,1.1
  Bottom Layer region: -5.594,1.099 -5.568,1.097 -5.542,1.094 -5.516,1.089 -5.491,1.083 -5.465,1.076 -5.441,1.067 -5.417,1.057 -5.393,1.046 -5.37,1.033 -5.348,1.019 -5.326,1.005 -5.305,0.989 -5.285,0.972 -5.266,0.954 -5.248,0.935 -5.231,0.915 -5.215,0.894 -5.201,0.872 -5.187,0.85 -5.174,0.827 -5.163,0.803 -5.153,0.779 -5.144,0.755 -5.137,0.729 -5.131,0.704 -5.126,0.678 -5.123,0.652 -5.121,0.626 -5.12,0.6 -5.12,-0.6 -5.121,-0.626 -5.123,-0.652 -5.126,-0.678 -5.131,-0.704 -5.137,-0.729 -5.144,-0.755 -5.153,-0.779 -5.163,-0.803 -5.174,-0.827 -5.187,-0.85 -5.201,-0.872 -5.215,-0.894 -5.231,-0.915 -5.248,-0.935 -5.266,-0.954 -5.285,-0.972 -5.305,-0.989 -5.326,-1.005 -5.348,-1.019 -5.37,-1.033 -5.393,-1.046 -5.417,-1.057 -5.441,-1.067 -5.465,-1.076 -5.491,-1.083 -5.516,-1.089 -5.542,-1.094 -5.568,-1.097 -5.594,-1.099 -5.62,-1.1 -5.646,-1.099 -5.672,-1.097 -5.698,-1.094 -5.724,-1.089 -5.749,-1.083 -5.775,-1.076 -5.799,-1.067 -5.823,-1.057 -5.847,-1.046 -5.87,-1.033 -5.892,-1.019 -5.914,-1.005 -5.935,-0.989 -5.955,-0.972 -5.974,-0.954 -5.992,-0.935 -6.009,-0.915 -6.025,-0.894 -6.039,-0.872 -6.053,-0.85 -6.066,-0.827 -6.077,-0.803 -6.087,-0.779 -6.096,-0.755 -6.103,-0.729 -6.109,-0.704 -6.114,-0.678 -6.117,-0.652 -6.119,-0.626 -6.12,-0.6 -6.12,0.6 -6.119,0.626 -6.117,0.652 -6.114,0.678 -6.109,0.704 -6.103,0.729 -6.096,0.755 -6.087,0.779 -6.077,0.803 -6.066,0.827 -6.053,0.85 -6.039,0.872 -6.025,0.894 -6.009,0.915 -5.992,0.935 -5.974,0.954 -5.955,0.972 -5.935,0.989 -5.914,1.005 -5.892,1.019 -5.87,1.033 -5.847,1.046 -5.823,1.057 -5.799,1.067 -5.775,1.076 -5.749,1.083 -5.724,1.089 -5.698,1.094 -5.672,1.097 -5.646,1.099 -5.62,1.1
  Keep-Out Layer board cut-out: -4.475,-2.1 -4.475,4.4 4.475,4.4 4.475,-2.1
  silkscreen extent -3.37,6.25 -3.17,6.45, body extent -5.77,-2.1 5.77,5.1, height 1.06
RSMD0603 [mm] "P1 - 0603"
  rect 0.6x0.8 smd: 1(-0.635,0) 2(0.635,0)
  body extent -0.8,-0.4 0.8,0.4, height 0.45
SOD-123 [mm]
  rect 0.91x1.22 smd: 1(-1.635,0) 2(1.635,0)
  silkscreen extent -1.35,-0.8 1.35,0.8, body extent -1.84,-0.8 1.84,0.8, height 1.35
SOT95P240X88-3N [mm]
  rect 0.8x0.9 smd: 1(-0.95,-1.05) 2(0.95,-1.05) 3(0,1.05)
  silkscreen extent -2.3,-1.15 1.45,0.9, body extent -1.43,-1.23 1.43,1.23, height 0.89
"SWITCH SLIDE DPDT" [mm]
  round 1.7 hole 1: 1(-2.5,-1.65) 2(0,-1.65) 3(2.5,-1.65) 4(-2.5,1.65) 5(0,1.65) 6(2.5,1.65)
  silkscreen extent -4.5,-2.5 4.5,1.9
"T-CONNECT 2030" [mm]
  round 0.8 smd paste-0.4: 1(-1.27,-0.635) 2(-1.27,0.635) 3(0,-0.635) 4(0,0.635) 5(1.27,-0.635) 6(1.27,0.635)
  round 0.85 hole 0.9 unplated mask+0: ""(-2.54,0) ""(2.54,-1.016) ""(2.54,1.016)
  silkscreen extent -3.54,-1.8 3.5,1.8
"TOUCHPAD-8MM+LED 4-SMD CIR" [mm]
  rect 1.4x0.8 smd far side rot 45: 1(2.404,1.273) 2(-1.273,-2.404) 3(-2.404,-1.273) 4(1.273,2.404)
  round 0.7 hole 0.4 mask+0.102: 5(-0.507,2.55) 5(0.507,-2.55)
  round 0.025 smd mask-2539.97: 6(-0.121,-3.588) 6(0.121,3.588)
  Top Layer circle w0.4: c0,0 r2.6
  Top Layer region: 4,0 3.604,1.736 2.494,3.127 0.89,3.9 -0.89,3.9 -2.494,3.127 -3.604,1.736 -4,0 -4,0 -3.2,0 -2.883,1.388 -1.995,2.502 -0.712,3.12 0.712,3.12 1.995,2.502 2.883,1.388 3.2,0 3.2,0
  Top Layer region: -4,0 -3.604,-1.736 -2.494,-3.127 -0.89,-3.9 0.89,-3.9 2.494,-3.127 3.604,-1.736 4,0 4,0 3.2,0 2.883,-1.388 1.995,-2.502 0.712,-3.12 -0.712,-3.12 -1.995,-2.502 -2.883,-1.388 -3.2,0 -3.2,0
  Keep-Out Layer board cut-out: 1.131,-1.131 0.612,-1.478 0,-1.6 -0.612,-1.478 -1.131,-1.131 -1.131,-1.131 -1.478,-0.612 -1.6,0 -1.478,0.612 -1.131,1.131 -1.131,1.131 -0.612,1.478 0,1.6 0.612,1.478 1.131,1.131 1.131,1.131 1.478,0.612 1.6,0 1.478,-0.612 1.131,-1.131
  body extent -2.83,-2.83 2.83,2.83
TP [mm] "point de test pour le eCompass"
  rect 1.2x1.2 smd paste-0.6: 1(0.01,-0.006)
  silkscreen extent -0.87,-0.86 0.9,0.89
TP10_22 [mm] "P438"
  rect 2.2x2.2 hole 1: 1(0,0)
  silkscreen extent -1.4,-1.4 1.4,1.4
UFQFPN48 [mm]
  rect 0.86x0.27 smd mask+0.05: 1(-3.435,2.75) 2(-3.435,2.25) 3(-3.435,1.75) 4(-3.435,1.25) 5(-3.435,0.75) 6(-3.435,0.25) 7(-3.435,-0.25) 8(-3.435,-0.75) 9(-3.435,-1.25) 10(-3.435,-1.75) 11(-3.435,-2.25) 12(-3.435,-2.75) 25(3.435,-2.75) 26(3.435,-2.25) 27(3.435,-1.75) 28(3.435,-1.25) 29(3.435,-0.75) 30(3.435,-0.25) 31(3.435,0.25) 32(3.435,0.75) 33(3.435,1.25) 34(3.435,1.75) 35(3.435,2.25) 36(3.435,2.75)
  rect 0.27x0.86 smd mask+0.05: 13(-2.75,-3.435) 14(-2.25,-3.435) 15(-1.75,-3.435) 16(-1.25,-3.435) 17(-0.75,-3.435) 18(-0.25,-3.435) 19(0.25,-3.435) 20(0.75,-3.435) 21(1.25,-3.435) 22(1.75,-3.435) 23(2.25,-3.435) 24(2.75,-3.435) 37(2.75,3.435) 38(2.25,3.435) 39(1.75,3.435) 40(1.25,3.435) 41(0.75,3.435) 42(0.25,3.435) 43(-0.25,3.435) 44(-0.75,3.435) 45(-1.25,3.435) 46(-1.75,3.435) 47(-2.25,3.435) 48(-2.75,3.435)
  rect 5.6x5.6 smd paste-4 mask+0.05: 49(0,0)
  silkscreen extent -4.6,-3.5 3.5,3.5, body extent -3.5,-3.5 3.5,3.5, height 0.65

## Part data
C1: library part CER-HV-13, "C X5R 10uF 20% 10V 0603", Manufacturer Part Number 1=C0603C106M8PACTU, Volt=10V, EMF_PN=CER-HV-13, Tol=0.2, Type=CX7R
C2 C3 C5 C6 C9: library part CX7R-24, "C X7R 0.1uF 10% 50V 0603", Manufacturer Part Number 1=C0603C104K5RAC, Volt=50V, EMF_PN=CX7R-24, Tol=0.05, Type=CX7R
C4 C12 C13: library part CER-HV-12, "C X7R 1uF 10% 16V 0603", Manufacturer Part Number 1=C0603C105K4RAC, Volt=16V, EMF_PN=CER-HV-12, Tol=0.1, Type=CX7R
C7 C8 C10 C11: library part CX7R-20, "C X7R 47nF 10% 50V 0603", Manufacturer Part Number 1=C0603C473K5RAC, Volt=50V, EMF_PN=CX7R-20, Tol=0.1, Type=CX7R
D1 D2 D3 D4 D5 D6 D7 D8 D9 D10 D11 D12 D13 D14 D15 D16 D17 D18 D19 D20 D21 D22 D23 D24: library part TouchPAD-BILED4SMD
D25: "Diodes - Zener 2.4 V 500 mW ±5% Montage en surface SOD-123"
K1: "IC MCU 32BIT 192KB FLASH UFQFPN48s"
K2: "3.3-Volt Low Drop Out Voltage Regulatator"
Q1: "MOSFET Pch -80V -10A TO-252, Power MOSFET"
R1: library part RSMD0603-81, "R SMD NOT MOUNTED  1% 60mW  CHIP 0603", Power=60mW, EMF_PN=RSMD0603-81, Stab(ppm)=100, Tol=0.01, Type=RSMD-0603
R2 R3 R5 R6 R7 R8 R9 R10 R11 R12 R13: library part RSMD0603-26, "R SMD 10K  1%  60mW  CHIP 0603", Power=60mW, EMF_PN=RSMD0603-26, Stab(ppm)=100, Tol=0.01, Type=RSMD-0603
R4: library part RSMD0603-33, "R SMD 39K  1%  60mW  CHIP 0603", Power=60mW, EMF_PN=RSMD0603-33, Stab(ppm)=100, Tol=0.01, Type=RSMD-0603
R14: library part RSMD0603-06, "R SMD 220E  1% 60mW  CHIP 0603", Power=60mW, EMF_PN=RSMD0603-06, Stab(ppm)=100, Tol=0.01, Type=RSMD-0603
R15 R16: "5.1 kOhms ±1% 0,1W, 1/10W Pavé résistif 0603 (1608 métrique) AutomobileAEC-Q200 Couche épaisse"
R17 R18 R19 R20 R21 R22 R23 R24 R25 R26 R27: library part RSMD0603-04, "R SMD 150E  1% 60mW  CHIP 0603", Power=60mW, EMF_PN=RSMD0603-04, Stab(ppm)=100, Tol=0.01, Type=RSMD-0603
S1: "Switch slide SPDT 300mA 6V"
TP1 TP7: library part TP-04, "Point de test CI isolé rouge", Manufacturer 1="Keystone Electronics", Manufacturer Part Number 1=5000, EMF_PN=TP-04, Type=TP
TP2 TP8: library part TP-03, "Point de test CI isolé noir", Manufacturer 1="Keystone Electronics", Manufacturer Part Number 1=5001, EMF_PN=TP-03, Type=TP
TP3 TP4 TP5 TP6: "Point de Test SMD"
X1: "Connecteur pour TC2030-NL"
X2: "USB-C (USB TYPE-C) USB 2.0 Receptacle Connector 24 (16+8 Dummy) Position Board Edge, Cutout; Surface Mount; Through Hole, Right Angle"

## Via types
v1: diameter 0.6, hole 0.3, Top Layer to Bottom Layer, tented both sides, 121 vias
v2: diameter 0.6, hole 0.3, Top Layer to Bottom Layer, 8 vias

## Nets (pads, with @x,y where several pads share a name; then routed paths per layer and width w, separated by ;. In a path a pad name is that pad's centre, name@x,y a point inside that pad or via, vN(x,y) a via of type N, cw(c..) or ccw(c..) an arc to the next point about the centre after c; other vN are vias at no path point)
C1: K1.17 R2.1 | length 34.7
  Bottom Layer w0.16: K1.17@42.75,39.065 42.75,37.952 43.03,37.672 43.03,37.541 46.053,34.518 57.266,34.518 57.557,34.226 58.805,34.226 59.545,34.967 59.545,35.452 60.194,36.1 R2.1@73.665,36.1
C1_LED: K1.29 R17.1 | length 8.4
  Bottom Layer w0.16: R17.1@33.299,37.77 33.479,37.949 36.714,37.949 37.449,38.684 37.449,41.174 38.023,41.748 38.563,41.748 K1.29@38.565,41.75
C1_TOUCH: D1.6 D4.6 D7.6 D10.6 D13.6 D16.6 D19.6 D22.6 R2.2 | length 219.1
  Top Layer w0.3: 4.8,46.2 4.879,46.279 ; 4.879,8.83 D10.6@5.121,8.588 ; D19.6@79.879,38.912 79.9,38.891 ; D22.6@79.879,76.412 80.121,76.17 ; 79.9,8.809 D16.6@80.121,8.588
  Top Layer w0.8: 4.879,8.83 D7.6@4.879,38.912 ; 4.879,46.279 D4.6@4.879,76.412 ; 8.6,5 38.9,5 ; 8.7,80.5 19.838,80.5 v1(20.505,79.832) ; v1(30.505,79.832) 30.923,80.25 38.65,80.25 ; 46.1,5 76.4,5 ; 79.9,8.809 79.9,38.891 ; D19.6@80.121,46.088 80.121,76.17
  Bottom Layer w0.3: v1(20.505,79.832) 22.436,77.902 28.575,77.902 v1(30.505,79.832) ; R2.2@74.935,36.1 v1(79.9,36.1)